# Altium PCB Low-Voltage-5V-Step-Up-Converter.PcbDoc
Units mil, origin at the board's own origin, x right, y up, seen from the top; angles counter-clockwise.
Board outline 2660 x 1095 mil, 2 copper layers (Top Layer, Bottom Layer); 15 components, 10 nets, 34 pads, 5 vias.
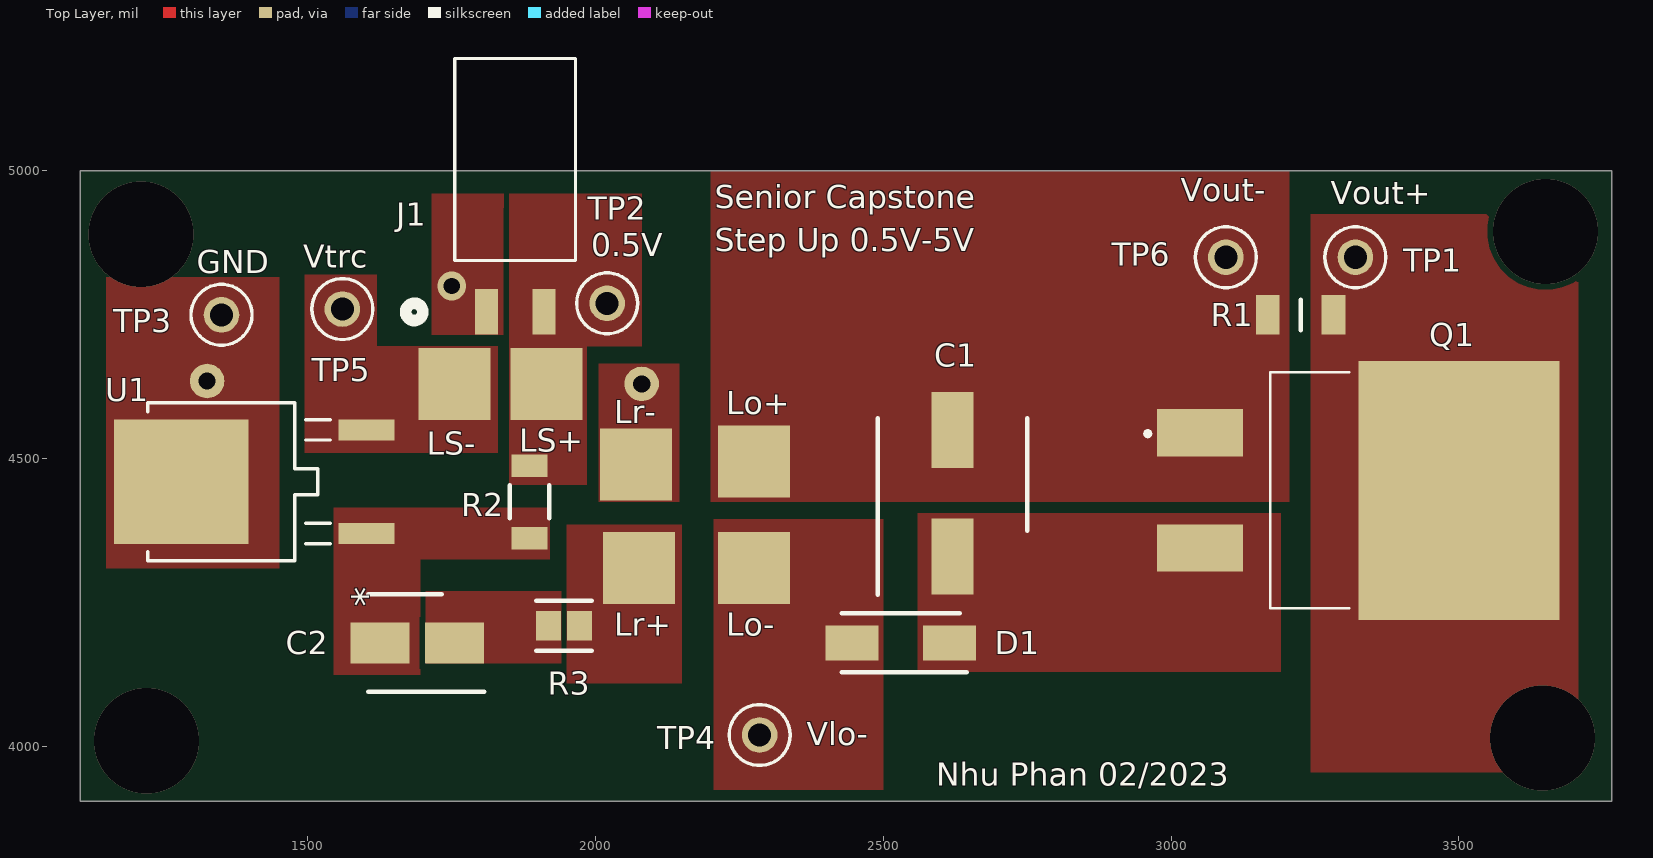
[diagram p0: Top Layer view]
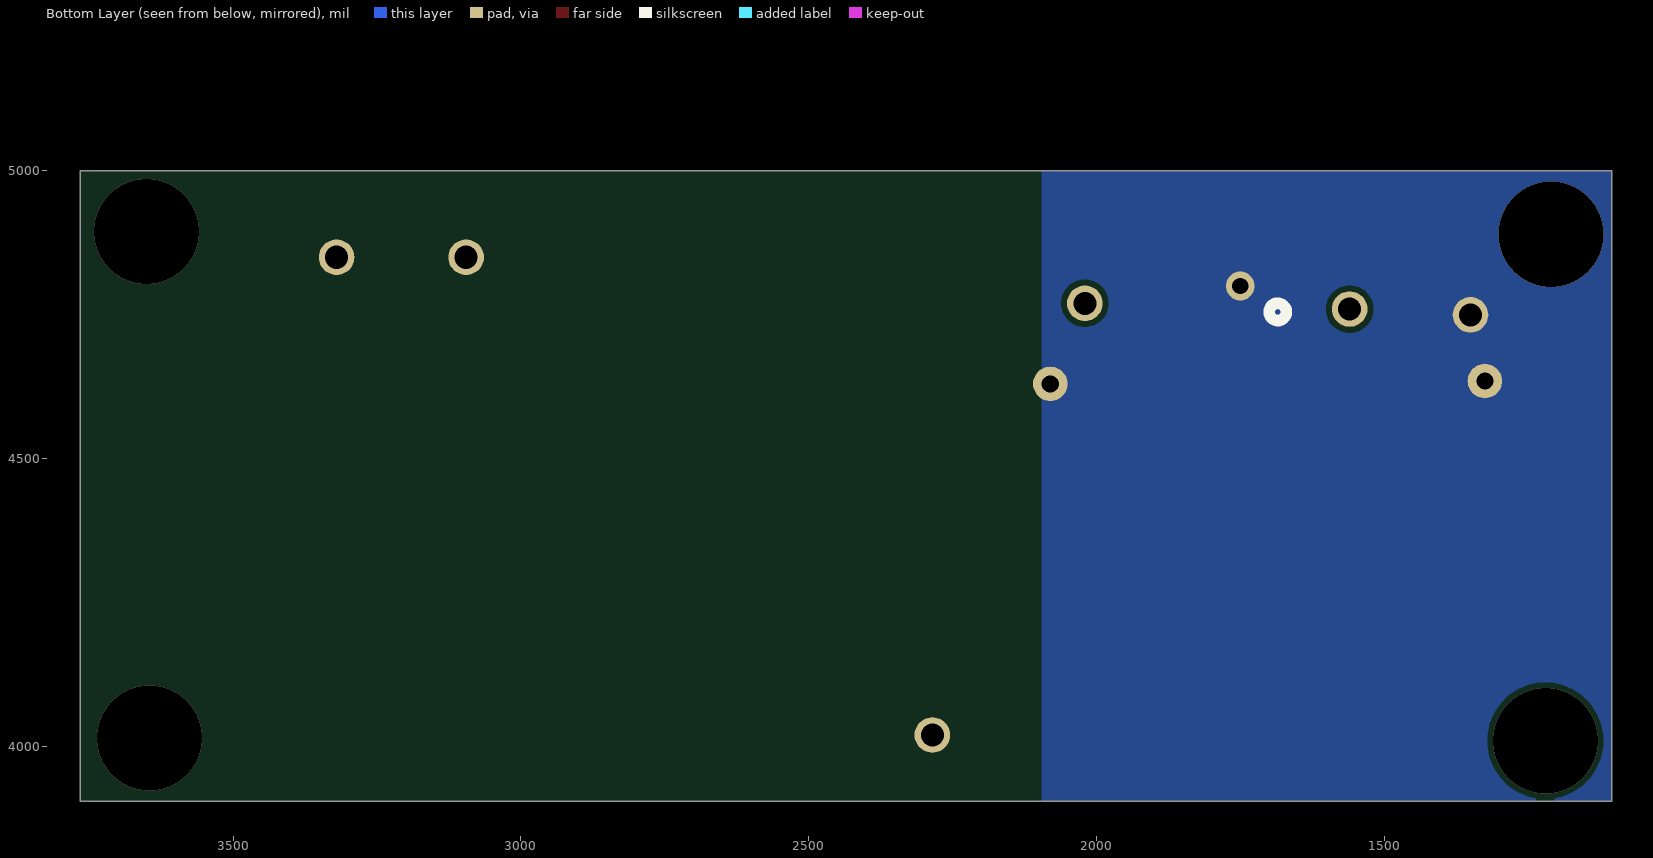
[diagram p1: Bottom Layer view, seen from below]
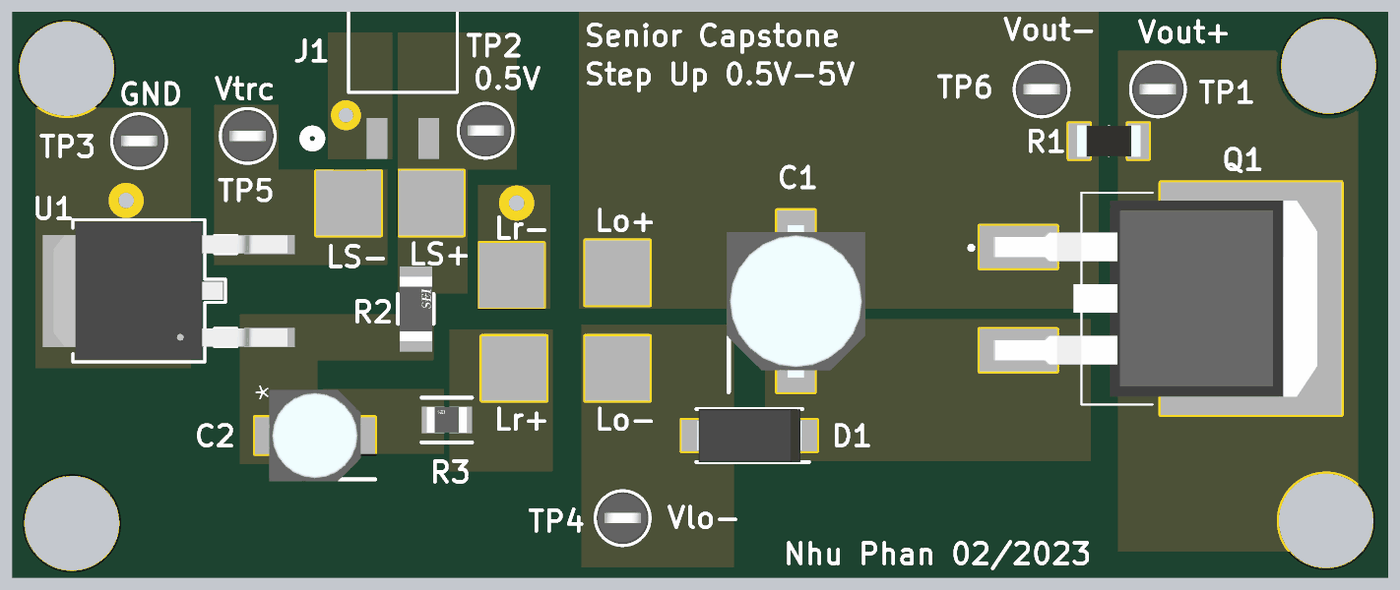
[diagram p2: 3D render of the assembled board from above, using the file's embedded part models]

## Layer stack, top to bottom
Top Solder: solder mask 0.4, Solder Resist, Dk 3.5
Top Layer: signal copper 1.4
Dielectric 1: dielectric 12.6, FR-4, Dk 4.8
Bottom Layer: signal copper 1.4
Bottom Solder: solder mask 0.4, Solder Resist, Dk 3.5

## Board outline
1105,3905 3765,3905 3765,5000 1105,5000

## Design rules (kind name [scope] priority, off if disabled: settings)
Clearance [All] p1: gap=10 ignorepadtopadclearanceinfootprint=FALSE except(0: Arc-Hole Track-Hole SMDPad-Hole THPad-Hole Via-Hole Fill-Hole Poly-Hole Region-Hole Text-Hole)
PlaneConnect [All] p1: planeconnectstyle=Direct reliefexpansion=20 reliefentries=4 reliefconductorwidth=10 reliefairgap=10
PolygonConnect [All] p1: connectstyle=Direct reliefconductorwidth=10 reliefentries=4 polygonreliefangle="90 Angle" airgapwidth=10
RoutingVias [All] p1: holewidth=28 width=50 viastyle="Through Hole" minholewidth=28 minwidth=50 maxholewidth=28 maxwidth=50
SolderMaskExpansion [All] p1: expansion=4 istentingtop=FALSE
Width [All] p1: maxlimit=10 minlimit=10 preferedwidth=10
29 further rules are at their usual default settings.

## Components (designator, comment, footprint, x,y, rotation, side; value= is the part's Value field where it differs from the comment)
C1 "107SML016M" CAPAE660X570N 2620,4440 r90 top
C2 "865250340002" CAPAE430X550N 1690,4180 r180 top
D1 "B2100A-13-F" DIOM5226X230N 2530,4180 r180 top
J1 "M20-7910242R" CONN2_910242R_HRW 1810,4755 r0 top
Q1 "IRF9Z34NSTRLPBF" IRF2804STRLPBF 3237.01,4445 r270 top
R1 "RC1206JR-0710KP" RESC3116X65N 3225,4750 r180 top
R2 "RMCF1206JT470R" FP-RMCF1206-MFG 1885,4425 r90 top
R3 "RNCP0805FTD10R0" FP-RNCP0805-IPC_C 1945,4210 r0 top
TP1 "5001" FP-5001-MFG 3320,4850 r0 top
TP2 "5001" FP-5001-MFG 2020,4770 r0 top
TP3 "5001" FP-5001-MFG 1350,4750 r0 top
TP4 "5001" FP-5001-MFG 2285,4020 r0 top
TP5 "5001" FP-5001-MFG 1560,4760 r0 top
TP6 "5001" FP-5001-MFG 3095,4850 r0 top
U1 "NJVMJD41CT4G" DPAK-4_6P22X6P73_ONS 1349.5,4460 r90 top

## Footprints (in the part's own frame and the unit in brackets; to place one, negate y for a bottom-side part, rotate by r counter-clockwise, add the part's x,y. Pads: shape width x height; smd on the part's side, far side on the other; paste and mask are expansions set on the pad)
CAPAE430X550N [mm]
  rect 2.6x1.8 smd: 1(-1.65,0) 2(1.65,0)
  silkscreen extent -2.95,-2.15 2.15,2.15, body extent -2.25,-2.25 2.25,2.25, height 5.5
CAPAE660X570N [mm]
  rect 3.35x1.85 smd: 1(-2.8,0) 2(2.8,0)
  silkscreen extent -4.47,-3.3 3.3,3.3, body extent -3.75,-3.4 3.75,3.4, height 5.7
CONN2_910242R_HRW [mil]
  rect 40x79 smd paste+0 mask+0: 1(0,0) 2(100,0)
  silkscreen extent -140,-15 155,440, body extent 0,0 10,10, height 10
DIOM5226X230N [mm]
  rect 2.35x1.55 smd: 1(-2.15,0) 2(2.15,0)
  silkscreen extent -2.93,-1.3 2.6,1.3, body extent -2.6,-1.3 2.6,1.3, height 2.3
DPAK-4_6P22X6P73_ONS [mil]
  rect 37x98 smd paste+0 mask+0: 1(-90,-252.5) 2(90,-252.5)
  rect 217x233 smd paste+0 mask+0: 3(0,69.5)
  silkscreen extent -138,-190 138,128, body extent -133,-288 133,165, height 94
FP-5001-MFG [mm]
  round 1.57 hole 1.016 paste-1000 mask+0: 1(0,0)
  silkscreen extent -1.35,-1.34 1.35,1.34, body extent -1.45,-1.45 1.45,1.45, height 0.25
FP-RMCF1206-MFG [mm]
  rect 1x1.6 smd paste+0 mask+0: 1(-1.6,0) 2(1.6,0)
  silkscreen extent -0.72,-0.87 0.72,0.87, body extent -2.2,-0.97 2.2,0.97, height 0.25
FP-RNCP0805-IPC_C [mil]
  rect 43.52x51.5 smd paste+0 mask+0: 1(-26.63,0) 2(26.63,0)
  silkscreen extent -48,-43 48,43, body extent -52,-31 52,31, height 10
IRF2804STRLPBF [mm]
  rect 2.08x3.81 smd: 1(-2.54,-4.75) 3(2.54,-4.75)
  rect 11.43x8.89 smd: 2(0,6.68)
  silkscreen extent -5.21,-7.15 5.21,1.85, body extent -4.82,-5.95 4.82,9.92, height 4.19
RESC3116X65N [mm]
  rect 1.05x1.75 smd: 1(-1.45,0) 2(1.45,0)
  silkscreen extent 0,-0.67 0,0.67, body extent -1.55,-0.77 1.55,0.77, height 0.65

## Part data
C1: "Capacitor Polarised", Manufacturer_Name="Cornell Dubilier", Mouser Part Number=598-107SML016M, Datasheet Link=https://www.cde.com/resources/catalogs/SML.pdf, Height=5.7mm, Manufacturer_Part_Number=107SML016M, Mouser Price/Stock=https://www.mouser.co.uk/ProductDetail/CDE-Illinois-Capacitor/107SML016M?qs=3tP%252BN51vMXcTATCBEHDSHw%3D%3D
C2: "Capacitor Polarised", Manufacturer_Name="Wurth Elektronik", Mouser Part Number=710-865250340002, Datasheet Link=https://componentsearchengine.com/Datasheets/2/865250340002.pdf, Height=5.5mm, Manufacturer_Part_Number=865250340002, Mouser Price/Stock=https://www.mouser.co.uk/ProductDetail/Wurth-Elektronik/865250340002?qs=0KOYDY2FL298qwYqQV5RgA%3D%3D
D1: "Schottky Diode", Manufacturer_Name="Diodes Inc.", Mouser Part Number=621-B2100A-13-F, Arrow Part Number=B2100A-13-F, Arrow Price/Stock=https://www.arrow.com/en/products/b2100a-13-f/diodes-incorporated?region=nac, Datasheet Link=https://www.diodes.com/assets/Datasheets/B2100A.pdf, Height=2.3mm, Manufacturer_Part_Number=B2100A-13-F, Mouser Price/Stock=https://www.mouser.co.uk/ProductDetail/Diodes-Incorporated/B2100A-13-F?qs=nSj%2Fl9JG2%2FrtwU96J2kxXw%3D%3D
J1: "No Description Available", Mfr_Name=Harwin, Copyright="Copyright (C) 2023 Ultra Librarian. All rights reserved.", Manufacturer_Part_Number=M20-7910242R, RefDes=RefDes, Type=DEV
Q1: "MOSFET (P-Channel)", Manufacturer_Name=Infineon, Mouser Part Number=942-IRF9Z34NSTRLPBF, Arrow Part Number=IRF9Z34NSTRLPBF, Arrow Price/Stock=https://www.arrow.com/en/products/irf9z34nstrlpbf/infineon-technologies-ag?region=nac, Datasheet Link=https://www.infineon.com/dgdl/irf9z34nspbf.pdf?fileId=5546d462533600a40153561228de1de0, Height=4.83mm, Manufacturer_Part_Number=IRF9Z34NSTRLPBF, Mouser Price/Stock=https://www.mouser.co.uk/ProductDetail/Infineon-IR/IRF9Z34NSTRLPBF?qs=9%252BKlkBgLFf3iGRjjyBkeug%3D%3D
R1: "Resistor", Manufacturer_Name=YAGEO, Resistance=10kΩ, Datasheet Link=https://www.mouser.com/datasheet/2/447/PYu-RC_Group_51_RoHS_L_9-1314892.pdf, Height=0.65mm, Manufacturer_Part_Number=RC1206JR-0710KP
R2: library part CMP-26527-000142-1, "470Ω ±5% 0.25W 1206 Thick Film Chip Resistor AEC-Q200 compliant", Case Code (Imperial)=1206, Case Code (Metric)=3216, Max Operating Temperature=155°C, Max Power Dissipation=250mW, Min Operating Temperature=-55°C, Resistance=470Ω, Resistor Type="Thick Film", Temperature Coefficient=200ppm/°C, Tolerance=5%, Case/Package=1206, Construction=Rectangular, Contact Plating=Tin, Depth=1.6mm, Features="Automotive AEC-Q200", Height=0.028inch, Lead Free="Lead Free", Length=3.2mm, Military Standard=Not, Mount="Surface Mount", Number of Terminations=2, Packaging="Tape and Reel", Power Rating=250mW, Radiation Hardening=No, RoHS Compliant=Yes, Series=RMCF, Size Code=1206, Width=0.063inch
R3: library part CMP-26527-001729-1, "10Ω ±1% 0.25W 0805 High Power Anti-Sulfur Thin Film Chip Resistor", Case Code (Imperial)=0805, Case Code (Metric)=2012, Max Operating Temperature=155°C, Max Power Dissipation=250mW, Min Operating Temperature=-55°C, Resistance=10Ω, Resistor Type="Thin Film", Temperature Coefficient=100ppm/°C, Tolerance=1%, Case/Package=0805, Features="Moisture Resistant", Height=0.024inch, Length=0.079inch, Mount="Surface Mount", Number of Terminations=2, Packaging="Tape and Reel", RoHS Compliant=Yes, Series=RNCP, Width=0.049inch
TP1 TP2 TP3 TP4 TP5 TP6: library part CMP-2000-05181-2, "PC TEST POINT MINIATURE BLACK", Color=Black, Flammability Rating="UL94 V-0", Package Quantity=100, Body Material=Bronze, Contact Material=Bronze, Contact Plating=Silver, Diameter=2.54mm, Height=0.3inch, Hole Diameter=1.6mm, Housing Color=Black, Inside Diameter=1.27mm, Insulation=Insulated, Insulation Material=Nylon, Lead Free="Lead Free", Length=7.62mm, Material=Nylon, Mount="Through Hole", Number of Contacts=1, Number of Ports=1, Orientation=Straight, Outside Diameter=2.54mm, Packaging=Bulk, Plating=Silver, REACH SVHC="No SVHC", RoHS Compliant=Yes, Series=THM, Termination="Through Hole"
U1: "No Description Available", Mfr_Name=onsemi, Copyright="Copyright (C) 2023 Ultra Librarian. All rights reserved.", Manufacturer_Part_Number=NJVMJD41CT4G, RefDes=RefDes, Type=DEV

## Free pads (board coordinates)
  rect 125x125 smd: 2(1755,4630) 2(1915,4630) 2(2070,4490) 2(2075,4310) 2(2275,4310) 2(2275,4495)
  round 60 hole 30: 3(2080,4630) 4(1325,4635)

## Via types
v1: diameter 182.5, hole 182.5, Top Layer to Bottom Layer, 4 vias
v2: diameter 50, hole 28, Top Layer to Bottom Layer, 1 vias

## Nets (pads, with @x,y where several pads share a name; then routed paths per layer and width w, separated by ;. In a path a pad name is that pad's centre, name@x,y a point inside that pad or via, vN(x,y) a via of type N, cw(c..) or ccw(c..) an arc to the next point about the centre after c; other vN are vias at no path point)
GND: J1.1 pad.2@2070,4490 pad.3 pad.4 TP3.1 U1.3
  other v1: 1210,4890
  other v2: 1750,4800
NetC1_1: C1.1 D1.1 Q1.3
NetC1_2: C1.2 pad.2@2275,4495 Q1.1 R1.2 TP6.1
NetC2_1: C2.1 R3.1
NetC2_2: C2.2 R2.1 U1.1
NetD1_2: D1.2 pad.2@2275,4310 TP4.1
NetJ1_2: J1.2 pad.2@1915,4630 R2.2 TP2.1
NetQ1_2: Q1.2 R1.1 TP1.1
  other v1: 3645,4015
NetR3_2: pad.2@2075,4310 R3.2
NetTP5_1: pad.2@1755,4630 TP5.1 U1.2
copper on no net:
  other v1: 1220,4010 3650,4895

## Polygon pours and split planes (outlines as drawn)
NetR3_2 on Top Layer "NETR3_2_L01_P006" (solid, pour order 6): 1950,4385 1950,4110 2150,4110 2150,4385
GND on Top Layer "GND_L01_P012" (solid, pour order 12): 2005,4665 2005,4425 2145,4425 2145,4665
NetD1_2 on Top Layer "NETD1_2_L01_P008" (solid, pour order 8): 2205,4395 2205,3925 2500,3925 2500,4395
NetC1_2 on Top Layer "NETC1_2_L01_P007" (solid, pour order 7): 2200,5000 2200,4425 3205,4425 3205,5000
NetJ1_2 on Top Layer "NETJ1_2_L01_P015" (solid, pour order 15): 1850,4960 1850,4455 1985,4455 1985,4695 2080,4695 2080,4960
NetTP5_1 on Top Layer "NETTP5_1_L01_P019" (solid, pour order 19): 1495,4820 1620,4820 1620,4695 1830,4695 1830,4510 1495,4510
GND on Top Layer "GND_L01_P018" (solid, pour order 18): 1795,4715 1840,4715 1840,4960 1715,4960 1715,4830 1715,4715
GND on Top Layer "GND_L01_P013" (solid, pour order 13): 1150,4815 1150,4310 1450,4310 1450,4815
NetQ1_2 on Top Layer "NETQ1_2_L01_P010" (solid, pour order 10): 3242.5,4925 3242.5,3955 3707.5,3955 3707.5,4925
NetC1_1 on Top Layer "NETC1_1_L01_P009" (solid, pour order 9): 2560,4405 2560,4130 3190,4130 3190,4405
NetC2_1 on Top Layer "NETC2_1_L01_P005" (solid, pour order 5): 1940,4270 1940,4145 1705,4145 1705,4270
NetC2_2 on Top Layer "NETC2_2_L01_P003" (solid, pour order 3): 1545,4415 1920,4415 1920,4325 1695,4325 1695,4125 1545,4125
GND on Bottom Layer "GND_L02_P011" (solid, pour order 11): 1105,5000 2095,5000 2095,3905 1105,3905

## Silkscreen, mask and mechanical layers (free items; w line width, h text height)
Top Overlay:
  text "Vout-" at 3017,4947 h40
  text "Vout+" at 3277,4942 h40
  text "Senior Capstone" at 2207,4935.33 h40
  text "Step Up 0.5V-5V" at 2207,4860.33 h40
  text "0.5V" at 1992,4852 h40
  text "Vtrc" at 1492,4832 h40
  text "GND" at 1307,4822 h40
  text "Lo+" at 2227,4577 h40
  text "Lr-" at 2032,4562 h40
  text "LS+" at 1867,4512 h40
  text "LS-" at 1707,4507 h40
  text "Lr+" at 2032,4192 h40
  text "Lo-" at 2227,4192 h40
  text "Vlo-" at 2367,4002 h40
  text "Nhu Phan 02/2023" at 2592,3932 h40

## Text inside footprints (layer, text, board x,y; h text height)
U1: Mechanical 13 "*" at 1487,4357.5 h50 r90; Top Overlay "*" at 1627,4242.5 h50 r90